# Altium PCB PCB.PcbDoc
Units mil, origin at the board's own origin, x right, y up, seen from the top; angles counter-clockwise.
Board outline 6005 x 2710 mil, 2 copper layers (Top Layer, Bottom Layer); 26 components, 34 nets, 120 pads, 4 vias.
Unrouted connection lines stored in the file: 3.
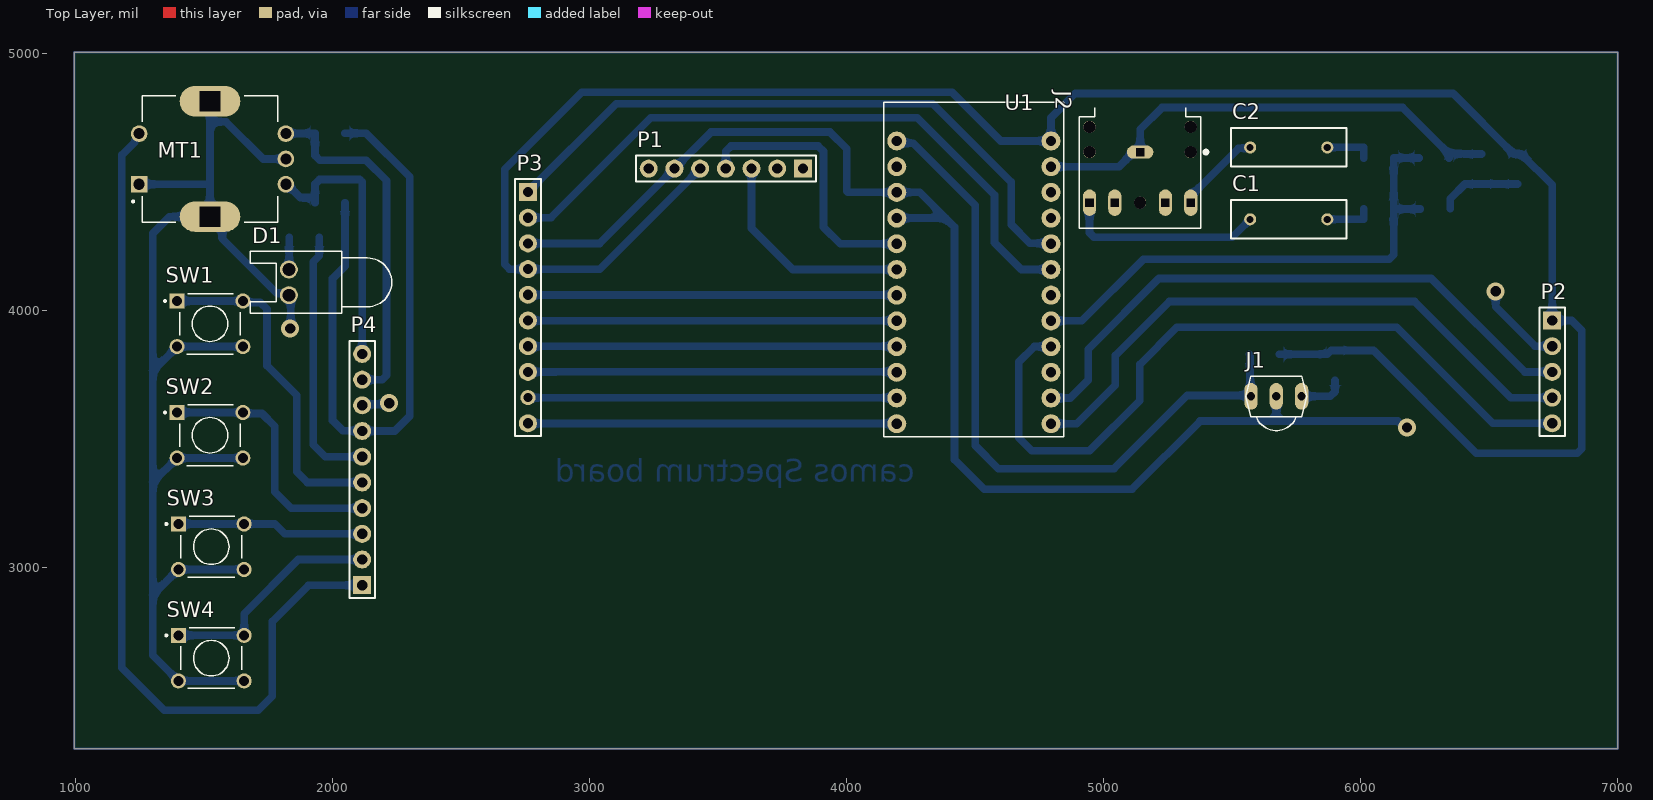
[diagram p0: Top Layer view]
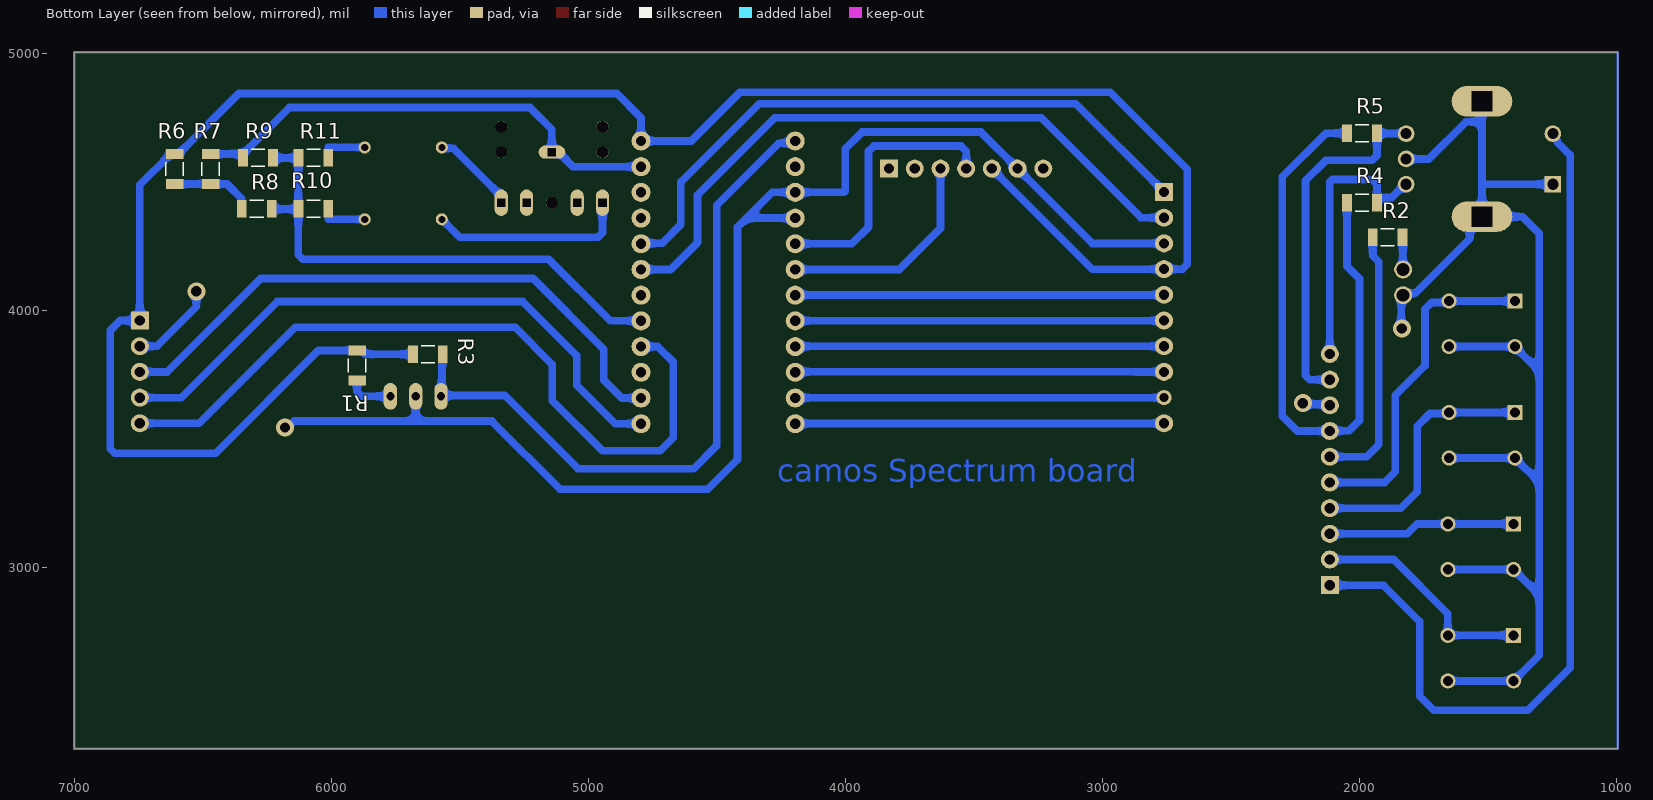
[diagram p1: Bottom Layer view, seen from below]

## Layer stack, top to bottom
Top Solder: solder mask 0.4, Solder Resist, Dk 3.5
Top Layer: signal copper 1.4
Dielectric 1: dielectric 12.6, FR-4, Dk 4.8
Bottom Layer: signal copper 1.4
Bottom Solder: solder mask 0.4, Solder Resist, Dk 3.5

## Board outline
995,2295 995,5005 7000,5005 7000,2295

## Design rules (kind name [scope] priority, off if disabled: settings)
Clearance [All] p1: gap=10 ignorepadtopadclearanceinfootprint=FALSE except(0: Arc-Hole Track-Hole SMDPad-Hole THPad-Hole Via-Hole Fill-Hole Poly-Hole Region-Hole Text-Hole)
PolygonConnect [All] p1: connectstyle=Relief reliefconductorwidth=10 reliefentries=4 polygonreliefangle="90 Angle" airgapwidth=10
RoutingVias [All] p1: holewidth=28 width=50 viastyle="Through Hole" minholewidth=28 minwidth=50 maxholewidth=28 maxwidth=50
SolderMaskExpansion [All] p1: expansion=4 istentingtop=FALSE
Width [All] p1: maxlimit=30 minlimit=20 preferedwidth=30
30 further rules are at their usual default settings.

## Components (designator, comment, footprint, x,y, rotation, side; value= is the part's Value field where it differs from the comment)
C1 "Cap" RAD-0.3 5720,4355 r180 top value=100pF
C2 "Cap" RAD-0.3 5720,4635 r180 top value=100pF
D1 "LED0" LED-0 1830,4110 r90 top
J1 "TSOP1838" TSOP18XX 5671.62,3667.5 r0 top
J2 "SJ1-3525NG" CUI_SJ1-3525NG 5141.85,4616.57 r270 top
MT1 "Rotary Encoder" XDCR_PEC11R-4215F-S0024 1522.95,4590 r90 top
P1 "DS1307" HDR1X7 3830,4552.53 r180 top
P2 "MAX7219" HDR1X5 6745,3961.44 r270 top
P3 "Header 10" HDR1X10#1 2760,4461.44 r270 top
P4 "Header 10" HDR1X10#2 2115,2931.44 r90 top
R1 "Res1" RESC3116X65N 5900,3786.69 r90 bottom value=100
R2 "Res1" RESC3116X65N 1890,4285 r180 bottom value=220
R3 "Res1" RESC3116X65N 5624.51,3830 r0 bottom value=10K
R4 "Res1" RESC3116X65N 1990,4420 r0 bottom value=10K
R5 "Res1" RESC3116X65N 1990,4690 r0 bottom value=10K
R6 "Res1" RESC3116X65N 6610,4550.81 r90 bottom value=10K
R7 "Res1" RESC3116X65N 6470,4550.81 r270 bottom value=10K
R8 "Res1" RESC3116X65N 6290,4395.88 r180 bottom value=100K
R9 "Res1" RESC3116X65N 6285,4594.12 r180 bottom value=100K
R10 "Res1" RESC3116X65N 6070,4395.88 r180 bottom value=5K1
R11 "Res1" RESC3116X65N 6070,4594.12 r180 bottom value=5K1
SW1 "1825910-6" SW_1825910-6-4 1522.95,3948.58 r0 top
SW2 "1825910-6" SW_1825910-6-4 1522.95,3515 r0 top
SW3 "1825910-6" SW_1825910-6-4 1527.95,3081.42 r0 top
SW4 "1825910-6" SW_1825910-6-4 1527.95,2647.84 r0 top
U1 "ARDUINO_PRO_MICRO" MODULE_ARDUINO_PRO_MINI 4495,4160 r0 top

## Footprints (in the part's own frame and the unit in brackets; to place one, negate y for a bottom-side part, rotate by r counter-clockwise, add the part's x,y. Pads: shape width x height; smd on the part's side, far side on the other; paste and mask are expansions set on the pad)
CUI_SJ1-3525NG [mm]
  oval 1.308x2.616 hole 0.8 square: 1(0,0)
  oval 2.616x1.308 hole 0.8 square: 2(5,-5) 3(5,5) 4(5,-2.5) 5(5,2.5)
  round 1.2 hole 1.2 unplated: ""(-2.5,5) ""(-2.5,-5) ""(0,5) ""(0,-5) ""(5,0)
  silkscreen extent -4.4,-6 7.5,6.67, body extent -6.48,-6.03 8.52,5.97, height 5.58
HDR1X5 [mil] "Connector; Header; 5 Position"
  rect 70x70 hole 40: 1(0,0)
  round 70 hole 40: 2(100,0) 3(200,0) 4(300,0) 5(400,0)
  silkscreen extent -50,-50 450,50
HDR1X7 [mil] "Connector; Header; 7 Position"
  rect 70x70 hole 40: 1(0,0)
  round 70 hole 40: 2(100,0) 3(200,0) 4(300,0) 5(400,0) 6(500,0) 7(600,0)
  silkscreen extent -50,-50 650,50
HDR1X10#1 [mil] "Connector; Header; 10 Position"
  rect 70x70 hole 40: 1(0,0)
  round 70 hole 40: 2(100,0) 3(200,0) 4(300,0) 5(400,0) 6(500,0) 7(600,0) 8(700,0) 10(900,0)
  round 59.06 hole 35.43: 9(800,0)
  silkscreen extent -50,-50 950,50
HDR1X10#2 [mil] "Connector; Header; 10 Position"
  rect 70x70 hole 40: 1(0,0)
  round 70 hole 40: 2(100,0) 3(200,0) 4(300,0) 5(400,0) 6(500,0) 7(600,0) 8(700,0) 9(800,0) 10(900,0)
  silkscreen extent -50,-50 950,50
LED-0 [mil] "LED; 2 Leads"
  round 70 hole 50: 1(50,0) 2(-50,0)
  silkscreen extent -120,-400 120,150
MODULE_ARDUINO_PRO_MINI [mil]
  round 74 hole 40: 0(-300,400) 1(-300,500) 2(-300,100) 3(-300,0) 4(-300,-100) 5(-300,-200) 6(-300,-300) 7(-300,-400) 8(-300,-500) 9(-300,-600) 10(300,-600) 14(300,-400) 15(300,-300) 16(300,-500) 18(300,-200) 19(300,-100) 20(300,0) 21(300,100) GND(-300,200) GND(-300,300) GND(300,400) RAW(300,500) RST(300,300) VCC(300,200)
  silkscreen extent -350,-650 350,650, body extent -350,-650 350,712, height 250
RAD-0.3 [mm] "Radial Cap, Thru-Hole; 2 Leads; 0.3 in Pin Spacing"
  round 1.2 hole 0.7: 1(-3.81,0) 2(3.81,0)
  silkscreen extent -5.71,-1.91 5.71,1.91
RESC3116X65N [mm]
  rect 0.97x1.73 smd: 1(-1.48,0) 2(1.48,0)
  silkscreen extent -0.67,-0.85 0.67,0.85, body extent -1.55,-0.8 1.55,0.8, height 0.65
SW_1825910-6-4 [mm]
  rect 1.498x1.498 / inner round 1.498 / far side rect 1.498x1.498 hole 0.99: 1(-3.25,2.25)
  round 1.498 hole 0.99: 2(3.25,2.25) 3(-3.25,-2.25) 4(3.25,-2.25)
  silkscreen extent -4.54,-3 3,3, body extent -3.9,-2.99 3.9,3, height 5.01
TSOP18XX [mil]
  oval 52x104 hole 32: GND(-0.05,-1.05) OUT(-98.47,-1.05) VCC(98.38,-1.05)
  silkscreen extent -118,-134 118,78, body extent -120,-160 116,60, height 404
XDCR_PEC11R-4215F-S0024 [mm]
  rect 1.65x1.65 hole 1.1: 1(-2.5,7)
  round 1.65 hole 1.1: 2(2.5,7) A(-2.5,-7.5) B(2.5,-7.5) COM(0,-7.5)
  oval 3x6 hole 2 square: S1(-5.7,0) S2(5.7,0)
  silkscreen extent -6.25,-6.7 6.25,7.7, body extent -5.85,-7.5 5.85,7.35, height 26.6

## Part data
C1 C2: "Capacitor", LatestRevisionDate=17-Jul-2002, LatestRevisionNote="Re-released for DXP Platform.", PackageDescription="Radial Cap, Thru-Hole; 2 Leads; 0.3 in Pin Spacing", PackageReference=RAD-0.3, Published=8-Jun-2000, Publisher="Altium Limited"
D1: "Typical INFRARED GaAs LED", LatestRevisionDate=08-Jul-2005, LatestRevisionNote="Mech Layer 1 removed.", PackageDescription="LED; 2 Leads", PackageReference=LED-0, Published=8-Jun-2000, Publisher="Altium Limited"
J1: "IR Receiver and Demodulator", Package=None, Availability=Unavailable, MP=TSOP1838, Price=None
J2: "3.5 mm Right-Angle Stereo Jack, 5 Pin PCB Mount, Isolated Ground", Package=None, Availability=Unavailable, MP=SJ1-3525NG, Price=None
MT1: library part PEC11R-4215F-S0024, "Incremental Encoder, 12 Mm, Contact Rating 10 Ma - 5 Vdc", Package=None, Availability=Unavailable, MP=PEC11R-4215F-S0024, Price=None
P1: library part "Header 7", "Header, 7-Pin", LatestRevisionDate=17-Jul-2002, LatestRevisionNote="Re-released for DXP Platform.", Publisher="Altium Limited"
P2: library part "Header 5", "Header, 5-Pin", LatestRevisionDate=17-Jul-2002, LatestRevisionNote="Re-released for DXP Platform.", Publisher="Altium Limited"
P3 P4: "Header, 10-Pin", LatestRevisionDate=17-Jul-2002, LatestRevisionNote="Re-released for DXP Platform.", Publisher="Altium Limited"
R1 R2 R3 R4 R5 R6 R7 R8 R9 R10 R11: "Resistor", LatestRevisionDate=17-Jul-2002, LatestRevisionNote="Re-released for DXP Platform.", PackageDescription="Axial Device, Thru-Hole; 2 Leads; 0.3 in Pin Spacing", PackageReference=AXIAL-0.3, Published=8-Jun-2000, Publisher="Altium Limited"
SW1 SW2 SW3 SW4: "Switch Push Button OFF (ON) SPST Round Button 0.05A 24VDC Momentary Contact PC Pins Thru-Hole", Package=None, Check_prices=https://www.snapeda.com/parts/1825910-6/TE+Connectivity+ALCOSWITCH+Switches/view-part/?ref=eda, Digi-Key_Part_Number=450-1650-ND, MF="TE Connectivity", MP=1825910-6, Purchase-URL=https://pricing.snapeda.com/search/part/1825910-6/?ref=eda, SnapEDA_Link=https://www.snapeda.com/parts/1825910-6/TE+Connectivity+ALCOSWITCH+Switches/view-part/?ref=snap
U1: "This board was developed for applications and installations where space is premium and projects are made as permanent set ups. Small, available in 3.3 V and 5 V versions, powered by ATmega328P.", Package=None, Check_prices=https://www.snapeda.com/parts/Arduino%20Pro%20Mini/Arduino/view-part/?ref=eda, MF=Arduino, MP="Arduino Pro Mini", SnapEDA_Link=https://www.snapeda.com/parts/Arduino%20Pro%20Mini/Arduino/view-part/?ref=snap

## Via types
v1: diameter 70, hole 40, Top Layer to Bottom Layer, 4 vias

## Nets (pads, with @x,y where several pads share a name; then routed paths per layer and width w, separated by ;. In a path a pad name is that pad's centre, name@x,y a point inside that pad or via, vN(x,y) a via of type N, cw(c..) or ccw(c..) an arc to the next point about the centre after c; other vN are vias at no path point)
AUDIO_IN: R8.2 R9.2 R10.1 R11.1 U1.18 | length 2019.4
  Bottom Layer w30: U1.18 4915,3960 5155,4200 6110.69,4200 6128.27,4217.57 R10.1@6128.27,4395 ; R11.1 R11.1@6128.27,4594 ; R9.2 6226.73,4594 R11.1@6128.27,4594 ; R8.2 6231.73,4395 R10.1@6128.27,4395 ; R10.1@6128.27,4395 R10.1 R11.1@6128.27,4594
CLK_MAX7: P2.5 U1.15 | length 2976.1
  Bottom Layer w30: U1.15 4730,3860 4670,3800 4670,3505 4720,3455 4945,3455 5140,3650 5140,3790 5285,3935 6140,3935 6513.56,3561.44 P2.5
CS_MAX7: P2.4 U1.10 | length 2368.9
  Bottom Layer w30: U1.10 4895,3560 5045,3710 5045,3825 5255,4035 6210,4035 6583.56,3661.44 P2.4
DIN_MAX7: P2.3 U1.16 | length 2363.5
  Bottom Layer w30: U1.16 4870,3660 4940,3730 4940,3850 5215,4125 6275,4125 6638.56,3761.44 P2.3
GND: J1.GND J2.1 P1.6 P2.2 P3.3 R7.1 R9.1 U1.GND | length 7465.1
  Bottom Layer w30: P3.3 3038.91,4261.44 P1.6 3472.47,4695 3935,4695 4000,4630 4000,4465 4005,4460 4195,4460 4285,4460 4385,4360 ; U1.GND@4195,4360 4385,4360 ; U1.GND@4795,4560 5059.53,4560 5116.1,4616.57 J2.1 5141.85,4704.85 5227,4790 6163.27,4790 R9.1@6343.27,4610 ; J1.GND 5671.57,3570.15 ; v1(6180,3545) 6169.18,3545 6144.03,3570.15 5671.57,3570.15 ; R9.1 R9.1@6343.27,4610 ; R7.1 6404,4609.08 6403.08,4610 R9.1@6343.27,4610 ; v1(6525,4075) 6525,4015 6678.56,3861.44 P2.2 ; 4385,4360 4420,4325 4420,3420 4535,3305 5110,3305 5375.15,3570.15 5671.57,3570.15
IR: J1.OUT R3.1 U1.1 | length 2735
  Bottom Layer w30: U1.1 4203.42,4651.58 4258.42,4651.58 4500,4410 4500,3475 4590,3385 5040,3385 5325,3670 5569.6,3670 J1.OUT@5569.7,3669.91 ; R3.1 5569.7,3826.55 J1.OUT@5569.7,3669.91 ; J1.OUT J1.OUT@5569.7,3669.91
LED: P3.5 U1.4 | length 1435.9
  Bottom Layer w10: U1.4@4194,4061 U1.4
  Bottom Layer w30: P3.5 2760,4061 U1.4@4194,4061
NetC1_1: C1.1 R10.2 | length 182.6
  Bottom Layer w30: C1.1 6011.73,4355 R10.2
NetC1_2: C1.2 J2.2 | length 778.4
  Bottom Layer w30: J2.2 4945,4302.57 4962.57,4285 5500,4285 C1.2
NetC2_1: C2.1 R11.2 | length 182.6
  Bottom Layer w30: C2.1 6011.73,4635 R11.2
NetC2_2: C2.2 J2.3 | length 335.6
  Bottom Layer w30: J2.3 5338.7,4445.47 5524.93,4631.7 5566.7,4631.7 C2.2
NetD1_1: D1.1 R2.2 | length 125.7
  Bottom Layer w30: D1.1 1830.87,4160.87 1830.87,4284.13 R2.2
NetJ1_VCC: J1.VCC R1.1 | length 181.1
  Bottom Layer w30: J1.VCC 5881.45,3666.45 5900,3685 R1.1
NetMT1_2: MT1.2 P4.1 | length 3481
  Bottom Layer w30: MT1.2 1247.36,4678.97 1230.61,4662.21 1230.61,4655.61 1180,4605 1180,2610 1345,2445 1710,2445 1765,2500 1765,2790 1906.44,2931.44 P4.1
NetP4_2: P4.2 SW4.1 SW4.2 | length 886.7
  Bottom Layer w30: SW4.1 SW4.2 1655.9,2820.9 1866.44,3031.44 P4.2
NetP4_3: P4.3 SW3.1 SW3.2 | length 731
  Bottom Layer w30: SW3.1 SW3.2 1775,3170 1813.56,3131.44 P4.3
NetP4_4: P4.4 SW2.1 SW2.2 | length 1023.5
  Bottom Layer w30: SW2.1 SW2.2 1654.88,3599.61 1725.39,3599.61 1775,3550 1775,3295 1838.56,3231.44 P4.4
NetP4_5: P4.5 SW1.1 SW1.2 | length 1315.4
  Bottom Layer w30: SW1.1 SW1.2 1656.45,4031.62 1718.38,4031.62 1745,4005 1745,3785 1860,3670 1860,3372.57 1901.14,3331.44 P4.5
NetP4_6: P4.6 R2.1 | length 1026.2
  Bottom Layer w30: R2.1 1948.27,4213.27 1925,4190 1925,3477.57 1971.14,3431.44 P4.6
NetR6_1: R6.1 R7.2 R8.1 | length 324.7
  Bottom Layer w30: R8.1 6348.27,4435 6405.81,4492.54 R7.2 R6.1
RE_A: P3.2 U1.20 | length 2548.7
  Bottom Layer w30: P3.2 2849.44,4361.44 3238,4750 4275,4750 4575,4450 4575,4265 4680,4160 U1.20
RE_B: P3.1 U1.21 | length 2499.7
  Bottom Layer w30: P3.1 3103.56,4805 4335,4805 4640,4500 4640,4335 4713,4262 4793,4262 U1.21
SCL_DS: P1.3 U1.3 | length 863.8
  Bottom Layer w30: P1.3 3630,4320 3790,4160 U1.3
SDA_DS: P1.4 U1.2 | length 1071
  Bottom Layer w30: P1.4 3530,4620 3550,4640 3890,4640 3910,4620 3910,4325 3975,4260 U1.2
SGND: D1.2 MT1.1 MT1.COM MT1.S1 MT1.S2 P4.8 SW1.3 SW1.4 SW2.3 SW2.4 SW3.3 SW3.4 SW4.3 SW4.4 | length 5250.5
  Bottom Layer w30: MT1.1 1519.53,4491.57 1522.95,4495 ; MT1.S2 1522.95,4735 ; SW2.4 SW2.3 1300,3331.42 ; SW1.4 SW1.3 1300,3765 ; SW4.4 SW4.3 1300,2659.25 1300,2892.84 ; SW3.4 SW3.3 1300,2892.84 ; MT1.COM 1730,4590 1585,4735 1522.95,4735 ; v1(1835,3930) 1837.65,3932.65 1837.65,4052.35 D1.2 1822.35,4067.65 1782.35,4067.65 1570.89,4279.11 1570.89,4324.89 1530.19,4365.59 MT1.S1 ; P4.8 2119.28,3635.72 2215.72,3635.72 v1(2220,3640) ; 1300,2892.84 1300,3331.42 ; 1300,3331.42 1300,3765 ; 1300,3765 1300,4300 1365.59,4365.59 MT1.S1 ; MT1.S1 1522.95,4495 ; 1522.95,4495 1522.95,4735
SRE_A: MT1.A P4.10 R4.1 | length 1072.6
  Bottom Layer w30: MT1.A 1822.76,4491.57 1875.28,4439.05 1927.64,4439.05 R4.1@1931.73,4434.96 ; R4.1 R4.1@1931.73,4434.96 ; P4.10 2115,4500 2105,4510 1949.31,4510 1931.73,4492.43 R4.1@1931.73,4434.96
SRE_B: MT1.B P4.9 R5.1 | length 1378.1
  Bottom Layer w30: MT1.B 1819.01,4689.21 1930.95,4689.21 R5.1 1931.73,4603.27 1950,4585 2130,4585 2210,4505 2210,3749.01 2192.43,3731.44 P4.9
SVCC: P4.7 R4.2 R5.2 | length 2460.9
  Bottom Layer w30: R4.2 2048.27,4173.27 2000,4125 2000,3572.57 2040.47,3532.1 2114.34,3532.1 P4.7 2241.44,3531.44 2300,3590 2300,4520 2130,4690 R5.2
SW_MOD: P3.9 U1.8 | length 1435.9
  Bottom Layer w10: U1.8@4194,3661 U1.8
  Bottom Layer w30: P3.9 2760,3661 U1.8@4194,3661
SW_MUT: P3.10 U1.9 | length 1435.9
  Bottom Layer w10: U1.9@4194,3561 U1.9
  Bottom Layer w30: P3.10 2760,3561 U1.9@4194,3561
SW_NEXT: P3.6 U1.5 | length 1435.9
  Bottom Layer w10: U1.5@4194,3961 U1.5
  Bottom Layer w30: P3.6 2760,3961 U1.5@4194,3961
SW_PP: P3.7 U1.6 | length 1435.9
  Bottom Layer w10: U1.6@4194,3861 U1.6
  Bottom Layer w30: P3.7 2760,3861 U1.6@4194,3861
SW_PRE: P3.8 U1.7 | length 1436.1
  Bottom Layer w10: 2867.44,3761.44 2868,3762 ; U1.7@4193,3762 U1.7
  Bottom Layer w30: P3.8 2867.44,3761.44 ; 2868,3762 U1.7@4193,3762
VCC: P1.5 P2.1 P3.4 R1.2 R3.2 R6.2 U1.RAW | length 8329.4
  Bottom Layer w30: P1.5 3038.91,4161.44 P3.4 2688.56,4161.44 2670,4180 2670,4550 2970,4850 4410,4850 4600,4660 U1.RAW 4795,4750 4890,4845 6359.12,4845 6595.04,4609.08 R6.2 6624.96,4609.08 6745,4489.04 P2.1 6820.99,3961.44 6860,3922.43 6860,3462.57 6842.43,3445 6450,3445 6050.04,3844.96 R1.2 5885.04,3844.96 5870.08,3830 R3.2
pads on no net: J2. J2.4 J2.5 P1.1 P1.2 P1.7 U1.0 U1.14 U1.19 U1.RST U1.VCC
copper on no net: | length 17430
  Bottom Layer w10: 995,2295 7000,2295 7000,5005 995,5005 995,2295

## Other copper
Bottom Layer:
  text "camos Spectrum board" at 4265,3305 h150